# Altium PCB BMS Master brd2.PcbDoc
Units mm, origin at the board's own origin, x right, y up, seen from the top; angles counter-clockwise.
Board outline 152.8 x 102 mm, 2 copper layers (Top Layer, Bottom Layer); 71 components, 56 nets, 298 pads, 43 vias.
Unrouted connection lines stored in the file: 49.
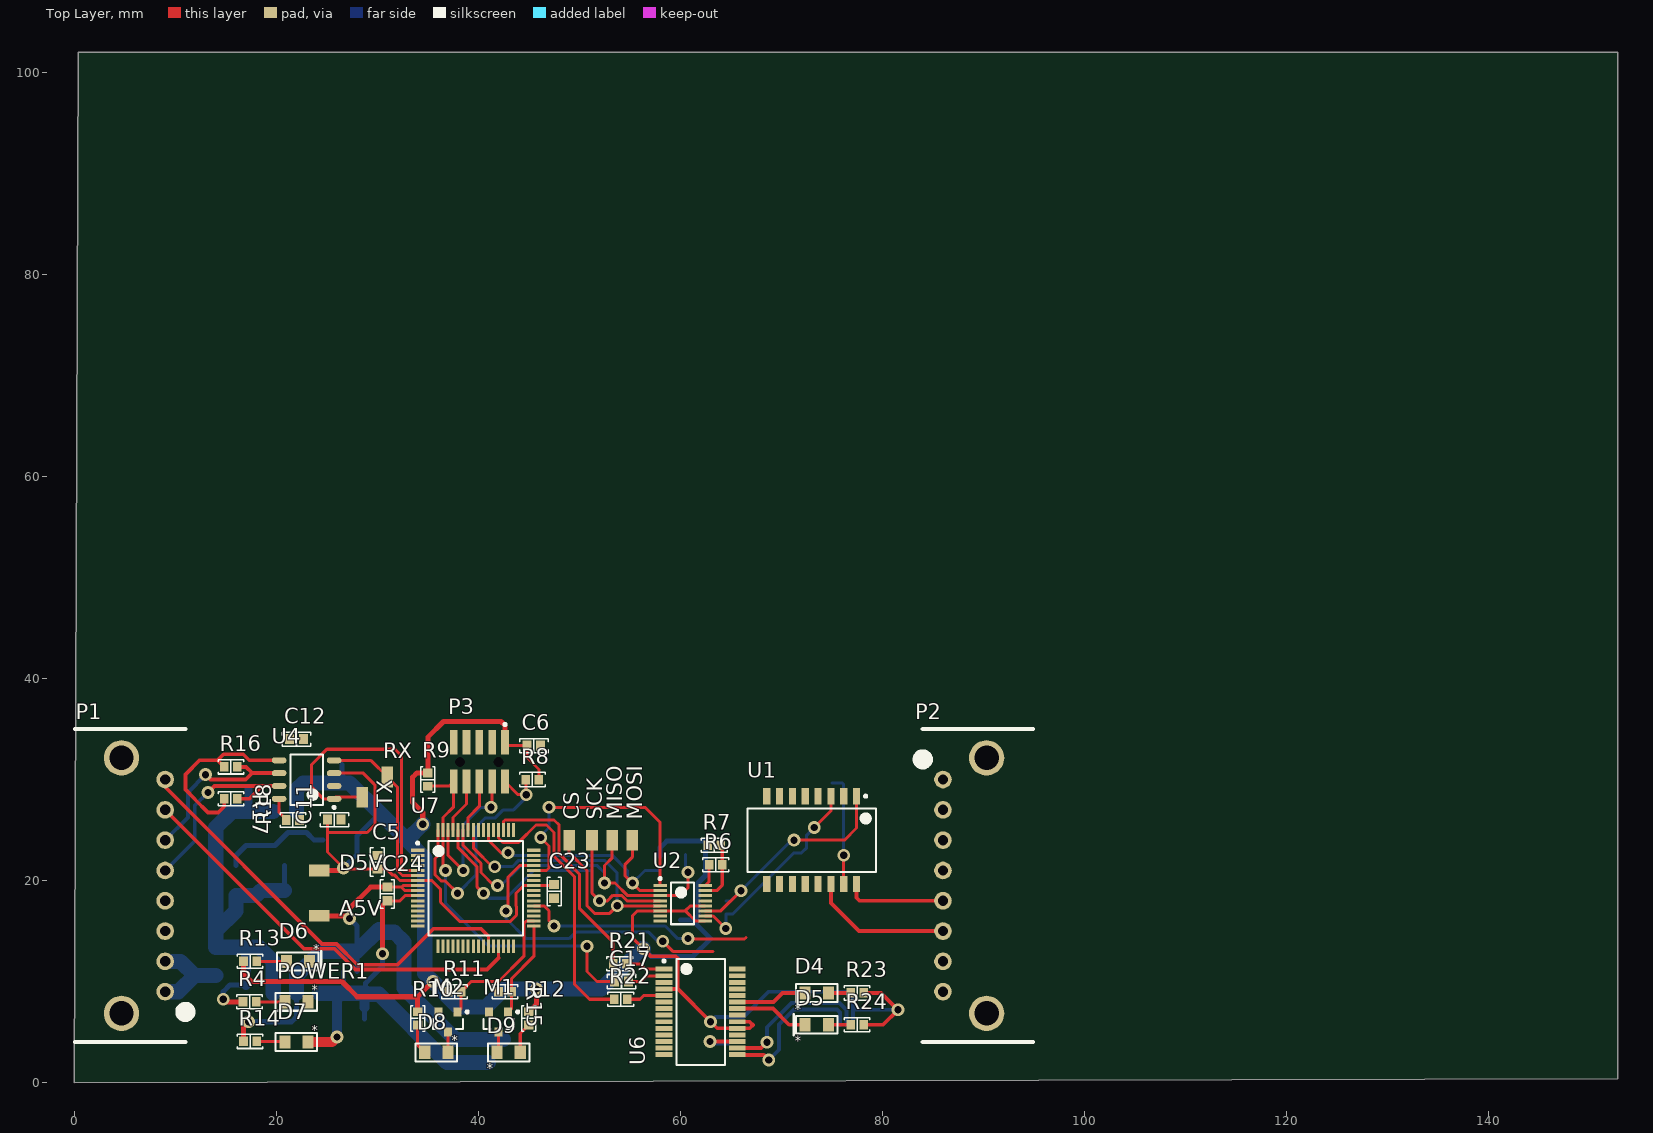
[diagram p0: Top Layer view]
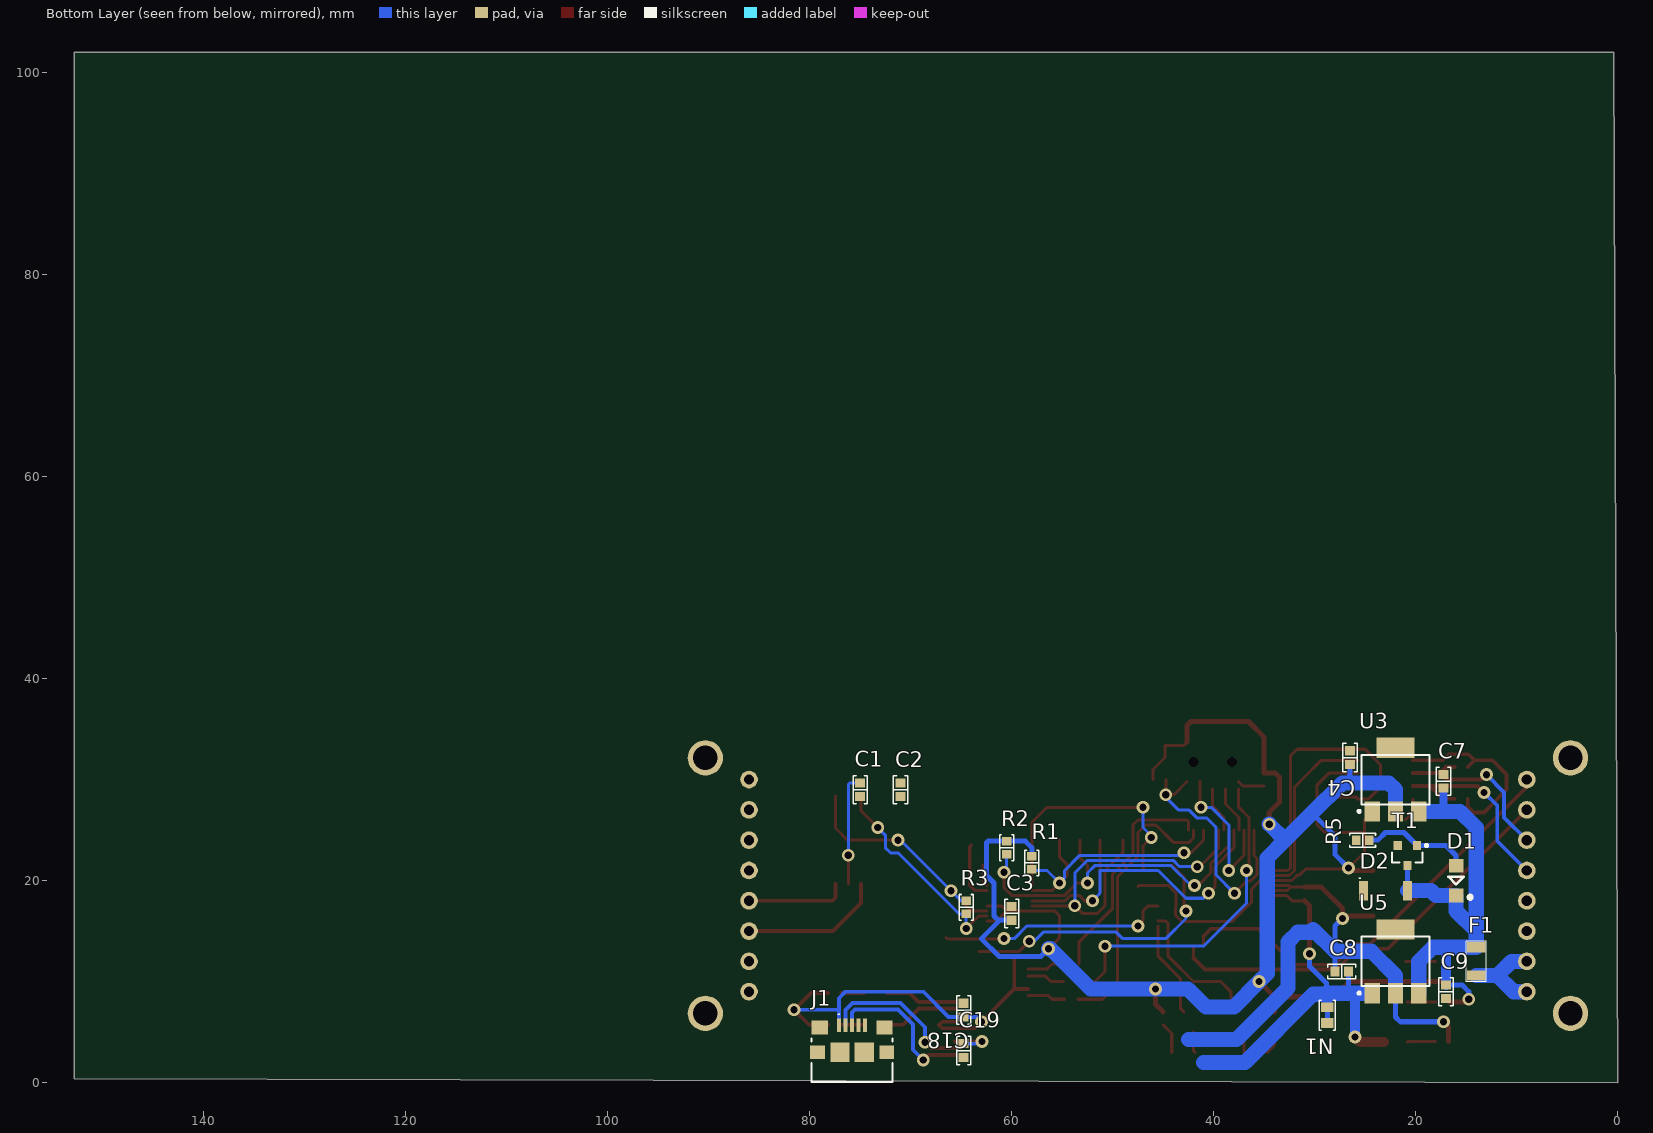
[diagram p1: Bottom Layer view, seen from below]
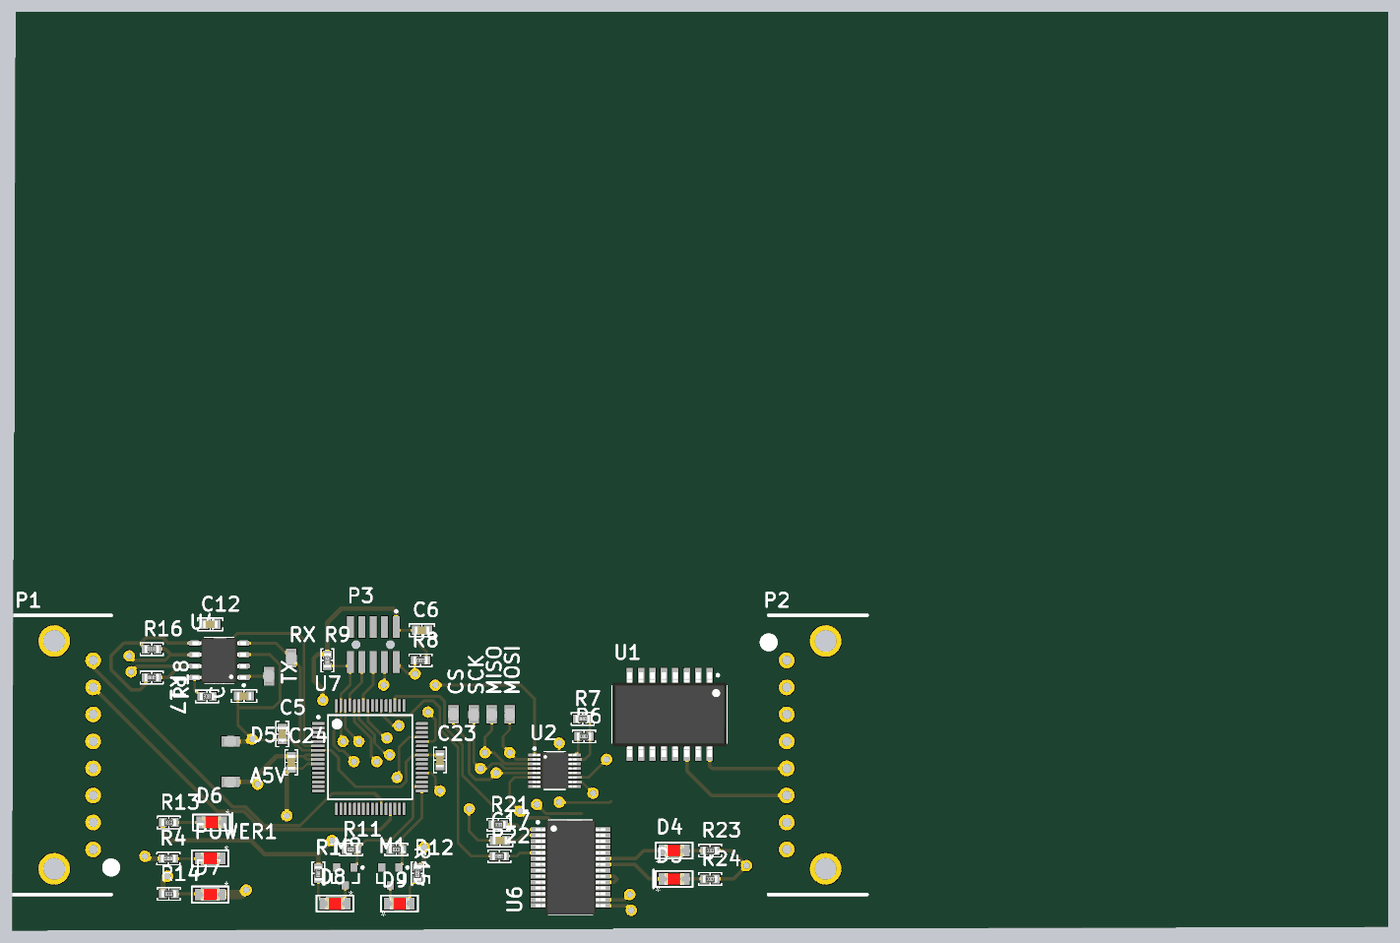
[diagram p2: 3D render of the assembled board from above, using the file's embedded part models]
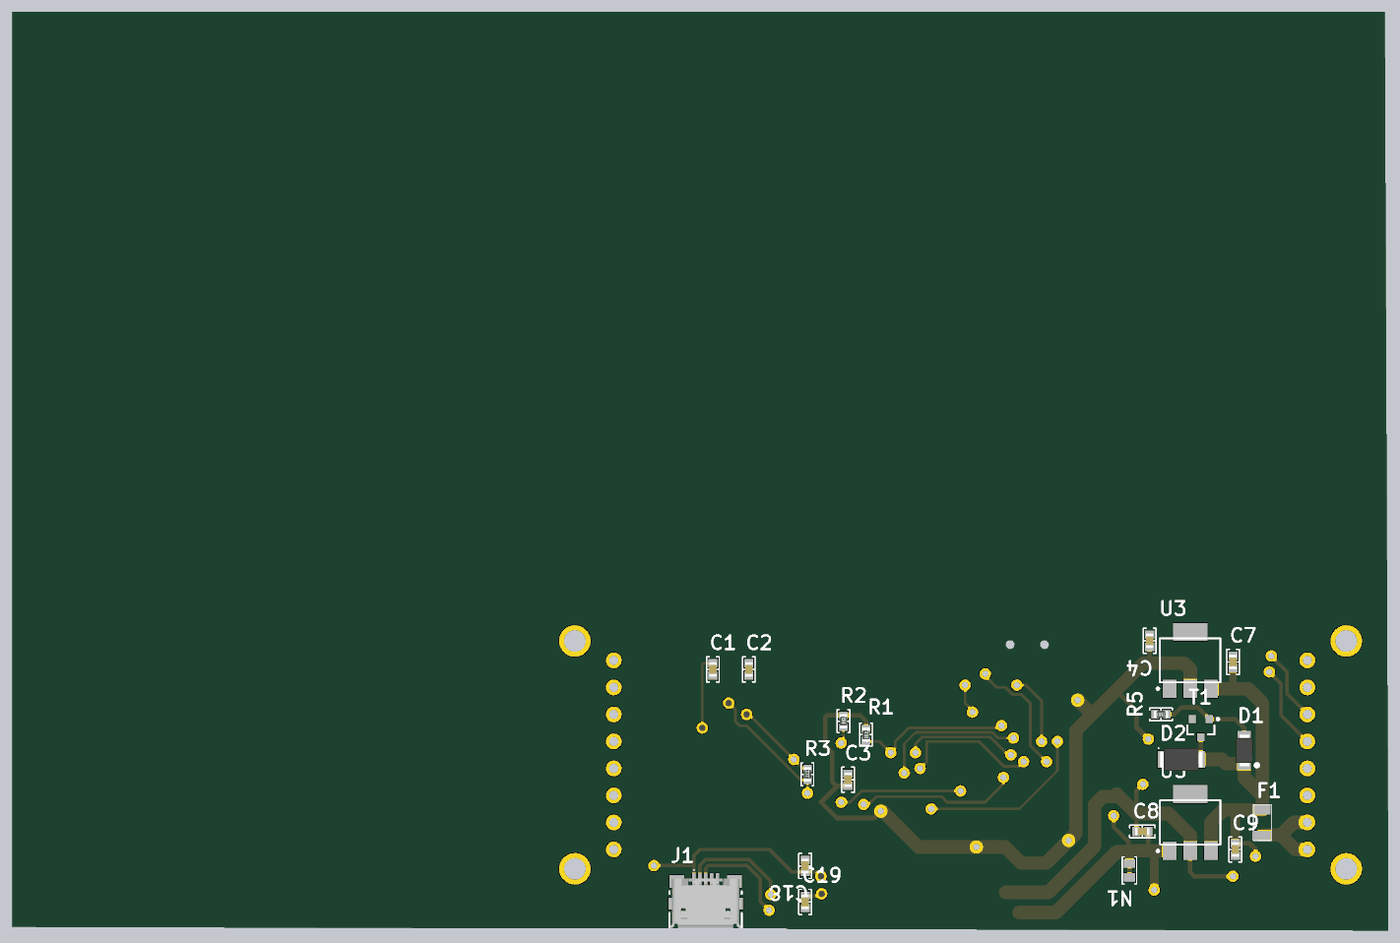
[diagram p3: 3D render of the assembled board from below, using the file's embedded part models]

## Layer stack, top to bottom
Top Solder: solder mask 0.0102, Solder Resist, Dk 3.5
Top Layer: signal copper 0.0356
Dielectric 1: dielectric 0.32, FR-4, Dk 4.8
Bottom Layer: signal copper 0.0356
Bottom Solder: solder mask 0.0102, Solder Resist, Dk 3.5

## Board outline
0,0 152.8,0.4 152.8,102 0.4,102

## Design rules (kind name [scope] priority, off if disabled: settings)
Clearance [All] p1: gap=0.254 ignorepadtopadclearanceinfootprint=FALSE except(0: Arc-Hole Track-Hole SMDPad-SMDPad SMDPad-Hole THPad-Hole Via-Hole Fill-Hole Poly-Hole Region-Hole Text-Hole; 0.1: Arc-Arc Arc-Track Arc-SMDPad Track-Track Track-SMDPad)
DiffPairsRouting [All] p1: maxlimit=0.254 minlimit=0.254 mostfreqgap=0.254 toplayer_minwidth=0.381 toplayer_maxwidth=0.381 toplayer_prefwidth=0.381 bottomlayer_minwidth=0.381 bottomlayer_maxwidth=0.381 bottomlayer_prefwidth=0.381 maxuncoupledlength=12.7
MatchedLengths "Schematic Matched Net Lengths" [InNet('D_N')] p1: tolerance=0.254 checknetsindiffpair=FALSE checkdiffpairvsdiffpair=TRUE checkxsignals=TRUE checkothers=TRUE
PolygonConnect [All] p1: connectstyle=Relief reliefconductorwidth=0.254 reliefentries=4 polygonreliefangle="90 Angle" airgapwidth=0.254
RoutingVias [All] p1: holewidth=0.711 width=1.27 viastyle="Through Hole" minholewidth=0.711 minwidth=1.27 maxholewidth=0.711 maxwidth=1.27
SolderMaskExpansion [All] p1: expansion=0.102
Width [All] p1: maxlimit=10 minlimit=0.254 preferedwidth=0.254 minimp=50.000000 maximp=50.000000 favimp=50.000000
29 further rules are at their usual default settings.

## Classes and differential pairs
component class U_USB: C17 C18 C19 D4 D5 J1 R21 R22 R23 R24 U6
component class U_RVP_OVP_LC: D1 D2 POWER1 R4 R5 T1
component class U_Power: A5V C4 C7 C8 C9 D5V D6 D7 R13 R14 U3 U5
component class U_MCU_MKE185F512VLH16: C5 C6 C23 C24 CS D8 D9 M1 M2 MISO MOSI P3 R8 R9 R10 R11 R12 R15 RX SCK TX U7
component class U_CAN_Tranceiver: C11 C12 R16 R17 R18 U4
component class "BMS Master": C1 C2 C3 F1 N1 P1 P2 R1 R2 R3 R6 R7 U1 U2
differential pair ISO: +ISO_P -ISO_N
differential pair D: +D_P -D_N
differential pair CAN: +CAN_P -CAN_N

## Components (designator, comment, footprint, x,y, rotation, side; value= is the part's Value field where it differs from the comment)
A5V "RCU-0C" RCU-0C 24.25,16.5 r90 top (schematic designator AVCC_5V)
C1 "Capacitor MLCC 27pf 25V CAP 0603/1608" "CAP 0603/1608" 75,29 r90 bottom value=27pf
C2 "Capacitor MLCC 27pf 25V CAP 0603/1608" "CAP 0603/1608" 71,29 r90 bottom value=27pf
C3 "Capacitor MLCC 0.10uf 25V CAP 0603/1608" "CAP 0603/1608" 60,16.75 r90 bottom value=0.10uf
C4 "Capacitor MLCC 10uf 25V CAP 0603/1608" "CAP 0603/1608" 26.5,32.175 r270 bottom value=10uf
C5 "Capacitor MLCC 0.10uf 25V CAP 0603/1608" "CAP 0603/1608" 30,21.825 r270 top value=0.10uf
C6 "Capacitor MLCC 0.10uf 16V CAP 0603/1608" "CAP 0603/1608" 45.5,33.35 r180 top value=0.10uf
C7 "Capacitor MLCC 10uf 25V CAP 0603/1608" "CAP 0603/1608" 17.25,29.825 r270 bottom value=10uf
C8 "Capacitor MLCC 10uf 25V CAP 0603/1608" "CAP 0603/1608" 27.325,11 r0 bottom value=10uf
C9 "Capacitor MLCC 10uf 25V CAP 0603/1608" "CAP 0603/1608" 17,9 r90 bottom value=10uf
C11 "Capacitor MLCC 0.10uf 50V CAP 0603/1608" "CAP 0603/1608" 25.75,26.037 r180 top value=0.10uf
C12 "Capacitor MLCC 4700pf 50V CAP 0603/1608" "CAP 0603/1608" 22,34 r180 top value=4700pf
C17 "Capacitor MLCC 0.10uf 25V CAP 0603/1608" "CAP 0603/1608" 54.175,10 r180 top value=0.10uf
C18 "Capacitor MLCC 0.10uf 25V CAP 0603/1608" "CAP 0603/1608" 64.75,7.175 r270 bottom value=0.10uf
C19 "Capacitor MLCC 0.10uf 25V CAP 0603/1608" "CAP 0603/1608" 64.75,3.175 r90 bottom value=0.10uf
C23 "Capacitor MLCC 100pf 25V CAP 0603/1608" "CAP 0603/1608" 47.5,18.925 r90 top value=100pf
C24 "Capacitor MLCC 0.10uf 25V CAP 0603/1608" "CAP 0603/1608" 31,18.675 r90 top value=0.10uf
CS "RCU-0C" RCU-0C 49,24 r0 top
D1 "DDZ9701-7" SOD123F 16,20 r270 bottom value=14Vz
D2 "DIODE" SOD-128 23,19 r180 bottom value=5A
D4 "" 0805_LED 73.5,8.875 r180 top value=Green
D5 "" 0805_LED 73.5,5.725 r180 top value=Red
D5V "RCU-0C" RCU-0C 24.25,21 r90 top (schematic designator DVCC_5V)
D6 "LED" 0805_LED 22.15,12 r0 top value=Red
D7 "LED" 0805_LED 22,4 r0 top value=Green
D8 "LED" 0805_LED 35.85,3 r0 top value=Green
D9 "LED" 0805_LED 43,3 r180 top value=Green
F1 "2.2A" "PTC Fuse 1206/3216" 14,12 r270 bottom
J1 "1981568-1" TECO-1981568-5_V 75.8,5.675 r180 bottom value=CONN
M1 "DMG2302UK-7" SOT23-3 42,6 r270 top value=N_Channel
M2 "DMG2302UK-7" SOT23-3 37,6 r270 top value=N_Channel
MISO "RCU-0C" RCU-0C 53.25,24 r180 top
MOSI "RCU-0C" RCU-0C 55.25,24 r180 top
N1 "Net_Tie" Net_Tie 28.75,6.675 r270 bottom net-tie
P1 "2-1445054-8" 2-1445054-8 9,9 r270 top
P2 "2-1445054-8" 2-1445054-8 86,30 r90 top
P3 "5103309-1" HDR2X5_SMT 40.095,31.75 r180 top value=CONN
POWER1 "LED" 0805_LED 22,8 r0 top value=Green
R1 "Resistor 10k 0603 1/10W 5%" "RES 0603/1608" 58,21.75 r90 bottom value=10k
R2 "Resistor 10k 0603 1/10W 5%" "RES 0603/1608" 60.5,23.25 r90 bottom value=10k
R3 "Resistor 120 0603 1/10W 5%" "RES 0603/1608" 64.5,17.35 r90 bottom value=120
R4 "Resistor 470 0603 1/10W 5%" "RES 0603/1608" 17.35,8 r180 top value=470
R5 "Resistor 47k 0603 1/10W 5%" "RES 0603/1608" 25.25,24 r180 bottom value=47k
R6 "Resistor 1.5k 0603 1/10W 5%" "RES 0603/1608" 63.5,21.56 r0 top value=1.5k
R7 "Resistor 1.0k 0603 1/10W 5%" "RES 0603/1608" 63.35,23.5 r0 top value=1.0k
R8 "Resistor 10k 0603 1/10W 1%" "RES 0603/1608" 45.35,30 r0 top value=10k
R9 "Resistor 10k 0603 1/10W 5%" "RES 0603/1608" 35,30 r90 top value=10k
R10 "Resistor 470 0603 1/10W 5%" "RES 0603/1608" 34,6.35 r90 top value=470
R11 "Resistor 10k 0603 1/10W 1%" "RES 0603/1608" 37.65,9 r0 top value=10k
R12 "Resistor 470 0603 1/10W 5%" "RES 0603/1608" 45,6.35 r90 top value=470
R13 "Resistor 200 0603 1/10W 5%" "RES 0603/1608" 17.4,12 r0 top value=200
R14 "Resistor 200 0603 1/10W 5%" "RES 0603/1608" 17.4,4.075 r0 top value=200
R15 "Resistor 10k 0603 1/10W 1%" "RES 0603/1608" 42.65,9 r0 top value=10k
R16 "Resistor 62 0603 1/10W 5%" "RES 0603/1608" 15.5,31.25 r180 top value=62
R17 "Resistor 62 0603 1/10W 5%" "RES 0603/1608" 15.5,28.095 r0 top value=62
R18 "Resistor 100 0603 1/10W 10%" "RES 0603/1608" 21.65,26 r180 top value=100
R21 "Resistor 1.0k 0603 1/10W 5%" "RES 0603/1608" 54,11.75 r180 top value=1.0k
R22 "Resistor 1.0k 0603 1/10W 5%" "RES 0603/1608" 54.1,8.25 r180 top value=1.0k
R23 "Resistor 1.0k 0603 1/10W 5%" "RES 0603/1608" 77.5,8.875 r0 top value=1.0k
R24 "Resistor 1.0k 0603 1/10W 5%" "RES 0603/1608" 77.5,5.725 r0 top value=1.0k
RX "RCU-0C" RCU-0C 31,30.25 r180 top (schematic designator TEST_CANRX1)
SCK "RCU-0C" RCU-0C 51.25,24 r180 top
T1 "DMG2302UK-7" SOT23-3 20.825,22.475 r270 bottom value=N_Channel
TX "RCU-0C" RCU-0C 28.5,28.25 r0 top (schematic designator TEST_CANTX1)
U1 "HX1188NLT" HX1188NLT 73,24 r270 top
U2 "LTC6820" MSOP-16 60.225,17.75 r0 top
U3 "NCP1117ST50T3G" SOT-223-3 22,30 r90 bottom value="5V 1.0A"
U4 "MCP2561 CAN Transceiver" SOIC-8 23,30 r180 top value=CAN/UART
U5 "NCP1117ST50T3G" SOT-223-3 22,12 r90 bottom value="5V 1.0A"
U6 "FT232RL" SSOP-28 62,7 r0 top
U7 "" TQFP64 39.75,19.25 r0 top

## Footprints (in the part's own frame and the unit in brackets; to place one, negate y for a bottom-side part, rotate by r counter-clockwise, add the part's x,y. Pads: shape width x height; smd on the part's side, far side on the other; paste and mask are expansions set on the pad)
2-1445054-8 [mm] "8p through hole connector"
  round 1.75 hole 1.02: 1(0,0) 2(-3,0) 3(-6,0) 4(-9,0) 5(-12,0) 6(-15,0) 7(-18,0) 8(-21,0)
  round 3.5 hole 2.41: 9(-23.15,-4.32) 10(2.15,-4.32)
  silkscreen extent -26,-8.92 5,2.5, body extent -26,-8.92 5,0, height 4.37
0805_LED [mm]
  rect 1.1x1.3 smd: 1(-1.15,0) 2(1.15,0)
  silkscreen extent -2.06,-0.89 2.03,0.89, body extent -1.05,-0.67 1.05,0.68, height 0.9
"CAP 0603/1608" [mm] "Chip Capacitor, 2-Leads, Body 1.60x0.80mm, IPC Medium Density"
  rect 0.9x1 smd: 1(-0.675,0) 2(0.675,0)
  silkscreen extent -1.4,-0.7 1.4,0.7, body extent -0.8,-0.41 0.8,0.41, height 0.82
HDR2X5_SMT [mm] "Header, 10-Leads, Body 3.43x6.35mm, Pitch 1.27mm"
  rect 0.76x2.4 smd: 1(-2.54,-1.95) 2(-2.54,1.95) 3(-1.27,-1.95) 4(-1.27,1.95) 5(0,-1.95) 6(0,1.95) 7(1.27,-1.95) 8(1.27,1.95) 9(2.54,-1.95) 10(2.54,1.95)
  round 0 hole 1 unplated: MH1(-1.905,0) MH2(1.905,0)
  silkscreen extent -2.67,-3.82 -2.42,-3.58, body extent -3.18,-1.72 3.18,1.72, height 4.55
HX1188NLT [mm] "XFRMR MAGNETIC 1PORT 1:1 10/100"
  rect 1.6x0.7 smd: 1(-4.35,4.445) 2(-4.35,3.175) 3(-4.35,1.905) 4(-4.35,0.635) 5(-4.35,-0.635) 6(-4.35,-1.905) 7(-4.35,-3.175) 8(-4.35,-4.445) 9(4.35,-4.445) 10(4.35,-3.175) 11(4.35,-1.905) 12(4.35,-0.635) 13(4.35,0.635) 14(4.35,1.905) 15(4.35,3.175) 16(4.35,4.445)
  silkscreen extent -4.47,-6.35 3.15,6.35, body extent -4.7,-6.35 4.7,6.35, height 5.97
MSOP-16 [mm]
  rect 1.35x0.3 smd: 1(-2.225,1.75) 2(-2.225,1.25) 3(-2.225,0.75) 4(-2.225,0.25) 5(-2.225,-0.25) 6(-2.225,-0.75) 7(-2.225,-1.25) 8(-2.225,-1.75) 9(2.225,-1.75) 10(2.225,-1.25) 11(2.225,-0.75) 12(2.225,-0.25) 13(2.225,0.25) 14(2.225,0.75) 15(2.225,1.25) 16(2.225,1.75)
  silkscreen extent -2.35,-2.08 1.15,2.57, body extent -2.45,-2.05 2.45,2.05, height 1.1
Net_Tie [mm] "Chip Resistor, 2-Leads, Body 2.00x1.25mm, IPC High Density"
  rect 0.95x1.25 smd: 1(-0.775,0) 2(0.775,0)
  Top Layer lines w0.5: 0.381,0 -0.381,0
  silkscreen extent -1.5,-0.8 1.5,0.8
"PTC Fuse 1206/3216" [mm]
  rect 1x1.8 smd: 1(-1.4,0) 2(1.4,0)
  silkscreen extent -2,-1 2,1, body extent -1.75,-1 1.75,1, height 1
RCU-0C [mm]
  rect 1.15x2.05 smd: 1(0,0)
  body extent -0.6,-0.77 0.6,0.82, height 1.16
"RES 0603/1608" [mm] "Chip Resistor, 2-Leads, Body 1.60x0.80mm, IPC Medium Density"
  rect 0.85x0.95 smd: 1(-0.65,0) 2(0.65,0)
  silkscreen extent -1.27,-0.7 1.27,0.7, body extent -0.8,-0.4 0.8,0.4, height 0.45
SOD123F [mm] "SODFL, 2-Leads, Body 1.80x3.50mm, IPC Low Density"
  rect 1.35x1.45 smd: 1(-1.475,0) 2(1.475,0)
  silkscreen extent -0.38,-0.76 1.75,1.5, body extent -1.75,-0.95 1.75,0.95, height 1.15
SOD-128 [mm] "SOD-128, 2-Leads, Body 2.40x4.70mm, IPC Medium Density"
  rect 0.9x1.9 smd: 1(-2.175,0) 2(2.175,0)
  silkscreen extent -2.57,1.2 -2.48,1.3, body extent -2.35,-1.25 2.35,1.25, height 0.85
SOIC-8 [mm] "SOIC, 8-Leads, Body 4.90x3.90mm, Pitch 1.27mm, IPC Medium Density"
  oval 1.45x0.6 smd: 1(-2.725,1.905) 2(-2.725,0.635) 3(-2.725,-0.635) 4(-2.725,-1.905) 5(2.725,-1.905) 6(2.725,-0.635) 7(2.725,0.635) 8(2.725,1.905)
  silkscreen extent -2.85,-2.5 1.6,2.88, body extent -3,-2.5 3,2.5, height 1.75
SOT23-3 [mm] "SOT23, 3-Leads, Body 2.92x2.37mm, Pitch 0.95mm, IPC Medium Density, NUP2105L"
  rect 0.9x0.8 smd: 1(-1,0.95) 2(-1,-0.95) 3(1,0)
  silkscreen extent -1.12,-1.5 0.7,2.03, body extent -0.7,-1.52 0.7,1.52, height 1.11
SOT-223-3 [mm] "SOT223127P600-8N, NCP1117STAT3G, MMBT4403-7-F"
  rect 2x1.5 smd: 1(-3.15,2.3) 2(-3.15,0) 3(-3.15,-2.3)
  rect 2x3.8 smd: THM(3.15,0)
  silkscreen extent -3.27,-3.35 2.45,3.73, body extent -1.85,-3.35 1.85,3.35, height 1.8
SSOP-28 [mm] "hi"
  rect 1.65x0.49 smd: 1(-3.625,4.225) 2(-3.625,3.575) 3(-3.625,2.925) 4(-3.625,2.275) 5(-3.625,1.625) 6(-3.625,0.975) 7(-3.625,0.325) 8(-3.625,-0.325) 9(-3.625,-0.975) 10(-3.625,-1.625) 11(-3.625,-2.275) 12(-3.625,-2.925) 13(-3.625,-3.575) 14(-3.625,-4.225) 15(3.625,-4.225) 16(3.625,-3.575) 17(3.625,-2.925) 18(3.625,-2.275) 19(3.625,-1.625) 20(3.625,-0.975) 21(3.625,-0.325) 22(3.625,0.325) 23(3.625,0.975) 24(3.625,1.625) 25(3.625,2.275) 26(3.625,2.925) 27(3.625,3.575) 28(3.625,4.225)
  silkscreen extent -3.75,-5.25 2.4,5.25, body extent -3.9,-5.25 3.9,5.25, height 2
TECO-1981568-5_V [mm] "SMD, 5-Leads, Body 8x5.9mm, Pitch 0.65mm"
  rect 0.4x1.35 smd: 1(-1.3,0) 2(-0.65,0) 3(0,0) 4(0.65,0) 5(1.3,0)
  rect 1.6x1.4 smd: 6(-3.2,-0.225) 7(3.2,-0.225)
  rect 1.45x1.3 smd: 8(-3.425,-2.675) 9(3.425,-2.675)
  rect 1.9x1.9 smd: 10(-1.2,-2.675) 11(1.2,-2.675)
  silkscreen extent -4,-5.63 4,1.12, body extent -4,-5.5 4,0.1, height 2.79
TQFP64 [mm] "TSQFP, 64-Leads, Body 10.00x10.00mm, Pitch 0.50mm, IPC Medium Density, MKE18F512VLH16"
  rect 1.35x0.3 smd: 1(-5.75,3.75) 2(-5.75,3.25) 3(-5.75,2.75) 4(-5.75,2.25) 5(-5.75,1.75) 6(-5.75,1.25) 7(-5.75,0.75) 8(-5.75,0.25) 9(-5.75,-0.25) 10(-5.75,-0.75) 11(-5.75,-1.25) 12(-5.75,-1.75) 13(-5.75,-2.25) 14(-5.75,-2.75) 15(-5.75,-3.25) 16(-5.75,-3.75) 33(5.75,-3.75) 34(5.75,-3.25) 35(5.75,-2.75) 36(5.75,-2.25) 37(5.75,-1.75) 38(5.75,-1.25) 39(5.75,-0.75) 40(5.75,-0.25) 41(5.75,0.25) 42(5.75,0.75) 43(5.75,1.25) 44(5.75,1.75) 45(5.75,2.25) 46(5.75,2.75) 47(5.75,3.25) 48(5.75,3.75)
  rect 0.3x1.35 smd: 17(-3.75,-5.75) 18(-3.25,-5.75) 19(-2.75,-5.75) 20(-2.25,-5.75) 21(-1.75,-5.75) 22(-1.25,-5.75) 23(-0.75,-5.75) 24(-0.25,-5.75) 25(0.25,-5.75) 26(0.75,-5.75) 27(1.25,-5.75) 28(1.75,-5.75) 29(2.25,-5.75) 30(2.75,-5.75) 31(3.25,-5.75) 32(3.75,-5.75) 49(3.75,5.75) 50(3.25,5.75) 51(2.75,5.75) 52(2.25,5.75) 53(1.75,5.75) 54(1.25,5.75) 55(0.75,5.75) 56(0.25,5.75) 57(-0.25,5.75) 58(-0.75,5.75) 59(-1.25,5.75) 60(-1.75,5.75) 61(-2.25,5.75) 62(-2.75,5.75) 63(-3.25,5.75) 64(-3.75,5.75)
  silkscreen extent -5.87,-4.67 4.67,4.68, body extent -5,-5 5,5, height 1.6

## Part data
A5V CS D5V MISO MOSI RX SCK TX: library part 5, Manufacturer_id=1, Package=0603, ComponentLink1Description=Datasheet, ComponentLink1URL=https://www.te.com/commerce/DocumentDelivery/DDEController?Action=srchrtrv&DocNm=1773266&DocType=DS&DocLang=English, Drawer_id=1, idTable=5, Link=https://www.digikey.com/product-detail/en/te-connectivity-amp-connectors/RCU-0C/A106145CT-ND/3477802, MfrPartNo=RCU-0C, Name=RCU-0C_Test_Point
C1 C2: library part 515, Dielectric=Ceramic, Manufacturer_id=1, Package="CAP 0603/1608", Voltage_Rating=25V, Created_By="Nick Mah", Created_Date=10/20/2018, Drawer_id=1, idCapacitor=515, Name="Cap_27pf_25V_CAP 0603/1608"
C3 C5 C17 C18 C19 C24: library part 583, Dielectric=Ceramic, Manufacturer_id=1, Package="CAP 0603/1608", Voltage_Rating=25V, Created_By="Nick Mah", Created_Date=10/20/2018, Drawer_id=1, idCapacitor=583, Name="Cap_0.10uf_25V_CAP 0603/1608"
C4 C7 C8 C9: library part 595, Dielectric=Ceramic, Manufacturer_id=1, Package="CAP 0603/1608", Voltage_Rating=25V, Created_By="Nick Mah", Created_Date=10/20/2018, Drawer_id=1, idCapacitor=595, Name="Cap_10uf_25V_CAP 0603/1608"
C6: library part 223, Dielectric=Ceramic, Manufacturer_id=1, Package="CAP 0603/1608", Voltage_Rating=16V, Created_By="Nick Mah", Created_Date=10/20/2018, Drawer_id=1, idCapacitor=223, Name="Cap_0.10uf_16V_CAP 0603/1608"
C11: library part 943, Dielectric=Ceramic, Manufacturer_id=1, Package="CAP 0603/1608", Voltage_Rating=50V, Created_By="Nick Mah", Created_Date=10/20/2018, Drawer_id=1, idCapacitor=943, Name="Cap_0.10uf_50V_CAP 0603/1608"
C12: library part 929, Dielectric=Ceramic, Manufacturer_id=1, Package="CAP 0603/1608", Voltage_Rating=50V, Created_By="Nick Mah", Created_Date=10/20/2018, Drawer_id=1, idCapacitor=929, Name="Cap_4700pf_50V_CAP 0603/1608"
C23: library part 529, Dielectric=Ceramic, Manufacturer_id=1, Package="CAP 0603/1608", Voltage_Rating=25V, Created_By="Nick Mah", Created_Date=10/20/2018, Drawer_id=1, idCapacitor=529, Name="Cap_100pf_25V_CAP 0603/1608"
D1: library part 10, "Zener Diode 14V 500mW ±5% Surface Mount SOD-123", Manufacturer_id=8, Package=SOD-123, Power=500mW, Supplier1PartNo=DDZ9701-7DICT-ND, ComponentLink1Description=Datasheet, ComponentLink1URL=https://www.diodes.com/assets/Datasheets/ds30410.pdf, Drawer_id=1, idDiode=10, Link=https://www.digikey.com/product-detail/en/diodes-incorporated/DDZ9701-7/DDZ9701-7DICT-ND/3877402, MfrPartNo=DDZ9701-7, Name=DDZ9701, Num_Circuits=1, Supplier1=Digi-Key, Type=Zener
D2: library part 12, "DIODE SCHOTTKY 30V 5A TMINIP2", Manufacturer_id=1, MfrPartNo=DB2431200L, Package=SOD-128, Power=30V, Supplier1PartNo=DB2431200LCT-ND, ComponentLink1Description=Datasheet, ComponentLink1URL=https://industrial.panasonic.com/content/data/SC/ds/ds4/DB2431200L_E.pdf, Drawer_id=1, Ic=5A, idDiode=12, Link=https://www.digikey.com/product-detail/en/panasonic-electronic-components/DB2431200L/DB2431200LCT-ND/3884430, Name=DB2431200L, Num_Circuits=1, Supplier1=Digi-Key, Type=Schottky
D4 D7 D8 D9 POWER1: library part 2, Manufacturer_id=1, Package=0805, Brightness=7mcd, Drawer_id=1, Id=20mA, idLED=2, Link=https://www.digikey.com/product-detail/en/visual-communications-company-vcc/CMD17-21VGD-TR8/L62505CT-ND/254936, Name=CMD17_0805_GREEN, Vf=2.1V
D5 D6: library part 1, Package=0805, Drawer_id=1, idLED=1, Manufacturer_id=1, Name=LED_0805_RED, Vf=0.7V
F1: library part 8, "Fuse", Manufacturer_id=1, MfrPartNo=1206L110/12SLYR, Drawer_id=1, I_hold=1.1A, I_max=50A, I_trip=2.2A, idFuse=8, LatestRevisionDate=17-Jul-2002, LatestRevisionNote="Re-released for DXP Platform.", Link=https://www.digikey.com/product-detail/en/littelfuse-inc/1206L110-12SLYR/F5764CT-ND/3593809, Name=Resettable, PackageDescription="Thru-Hole; 2 Leads", PackageReference=PIN-W2/E2.8, Pd_Typ=.8W, Published=8-Jun-2000, Publisher="Altium Limited", V_max=12V
J1: library part 5, "USB Micro Type B", Manufacturer_id=1, ComponentLink1Description=Datasheet, Created_By=Aiku, Created_Date=10/20/2018, Drawer_id=1, idConn=5, Link=https://www.mouser.com/ProductDetail/TE-Connectivity-AMP/1981568-1?qs=sGAEpiMZZMulM8LPOQ%252bykzEIUPbUCiSfqsfxH3Oq%252bYo%3d, MfrPartNo=1981568-1, Name="TE USB Micro", Num_Contacts=5, Supplier1=TE
M1 M2 T1: library part 6, "MOSFET N-CHANNEL 30V 5A SOT23", Manufacturer_id=1, Package=SOT-23, Created_By=Angel, Drawer_id=1, Id=2.8A, idFETs=6, Link=https://www.digikey.com/product-detail/en/diodes-incorporated/DMG2302UK-7/DMG2302UK-7DICT-ND/6010163, MfrPartNo=DMG2302UK-7, Name=DMG2302UK-7, Num_Circuits=1, Rds_On=90mOhm, Supplier1=Digi-Key, Vdss=20V, Vgs(Max)=1V, Vgs(typ)=800mV
N1 U7: library part 1, Drawer_id=1, Manufacturer_id=1
  N1: idFuse=3, idShunt=1, Name="Net Tie"
  U7: idMCU=1, Name="MKE18F512VLH16 MCU"
P1 P2: library part 12, "1x8 connector", Manufacturer_id=5, Supplier1PartNo=2-1445054-8-ND, ComponentLink1Description=Datasheet, Created_By=Graydon, Created_Date=11/10/2018, Drawer_id=1, idConn=12, Link=https://www.digikey.com/product-detail/en/te-connectivity-amp-connectors/2-1445054-8/2-1445054-8-ND/1890093, MfrPartNo=2-1445054-8, Name="Micro MATE-N-LOK 1x8", Num_Contacts=8, Num_Rows=1, Supplier1=Digi-Key
P3: library part 4, "2 row connector", Manufacturer_id=1, Voltage_Rating=None, ComponentLink1Description=Datasheet, Created_By=Aiku, Drawer_id=1, idConn=4, Link=https://www.digikey.com/product-detail/en/5103309-1/A33160-ND/1114898?utm_campaign=buynow&WT.z_cid=ref_octopart_dkc_buynow&utm_medium=aggregator&curr=usd&site=us&utm_source=octopart, MfrPartNo=5103309-1, Name=CONN_TE_2X5POS, Num_Contacts=10, Num_Rows=2, Pitch=2.54mm
R1 R2 R9: library part 1393, Manufacturer_id=1, Package=0603, Power=1/10W, Tolerance=5%, ComponentLink1Description=Datasheet, Created_By="Nick Mah", Created_Date=2018-10-20, Drawer_id=1, idResistor=1393, Name=Res_10k_0603_1/10W_5%, Supplier 1=Digi-Key
R3: library part 1347, Manufacturer_id=1, Package=0603, Power=1/10W, Tolerance=5%, ComponentLink1Description=Datasheet, Created_By="Nick Mah", Created_Date=2018-10-20, Drawer_id=1, idResistor=1347, Name=Res_120_0603_1/10W_5%, Supplier 1=Digi-Key
R4 R10 R12: library part 1361, Manufacturer_id=1, Package=0603, Power=1/10W, Tolerance=5%, ComponentLink1Description=Datasheet, Created_By="Nick Mah", Created_Date=2018-10-20, Drawer_id=1, idResistor=1361, Name=Res_470_0603_1/10W_5%, Supplier 1=Digi-Key
R5: library part 1409, Manufacturer_id=1, Package=0603, Power=1/10W, Tolerance=5%, ComponentLink1Description=Datasheet, Created_By="Nick Mah", Created_Date=2018-10-20, Drawer_id=1, idResistor=1409, Name=Res_47k_0603_1/10W_5%, Supplier 1=Digi-Key
R6: library part 1373, Manufacturer_id=1, Package=0603, Power=1/10W, Tolerance=5%, ComponentLink1Description=Datasheet, Created_By="Nick Mah", Created_Date=2018-10-20, Drawer_id=1, idResistor=1373, Name=Res_1.5k_0603_1/10W_5%, Supplier 1=Digi-Key
R7 R21 R22 R23 R24: library part 1369, Manufacturer_id=1, Package=0603, Power=1/10W, Tolerance=5%, ComponentLink1Description=Datasheet, Created_By="Nick Mah", Created_Date=2018-10-20, Drawer_id=1, idResistor=1369, Name=Res_1.0k_0603_1/10W_5%, Supplier 1=Digi-Key
R8 R11 R15: library part 313, Manufacturer_id=1, Package=0603, Power=1/10W, Tolerance=1%, ComponentLink1Description=Datasheet, Created_By="Nick Mah", Created_Date=2018-10-20, Drawer_id=1, idResistor=313, Name=Res_10k_0603_1/10W_1%, Supplier 1=Digi-Key
R13 R14: library part 1352, Manufacturer_id=1, Package=0603, Power=1/10W, Tolerance=5%, ComponentLink1Description=Datasheet, Created_By="Nick Mah", Created_Date=2018-10-20, Drawer_id=1, idResistor=1352, Name=Res_200_0603_1/10W_5%, Supplier 1=Digi-Key
R16 R17: library part 1340, Manufacturer_id=1, Package=0603, Power=1/10W, Tolerance=5%, ComponentLink1Description=Datasheet, Created_By="Nick Mah", Created_Date=2018-10-20, Drawer_id=1, idResistor=1340, Name=Res_62_0603_1/10W_5%, Supplier 1=Digi-Key
R18: library part 2293, Manufacturer_id=1, Package=0603, Power=1/10W, Tolerance=10%, ComponentLink1Description=Datasheet, Created_By="Nick Mah", Created_Date=2018-10-20, Drawer_id=1, idResistor=2293, Name=Res_100_0603_1/10W_10%, Supplier 1=Digi-Key
U1: library part 8, Manufacturer_id=1, Created_By=Angel, Drawer_id=1, idFuse=3, idIC_Interface=8, Link=https://www.digikey.com/product-detail/en/pulse-electronics-network/HX1188NLT/553-1536-1-ND/3151809?utm_adgroup=Transformers&slid=&gclid=CjwKCAiAhp_jBRAxEiwAXbniXRrdDycXKcdMEppGgTacWMJf80VG2GQDdYxlb9yRzxEZsto0mBbjlhoCtm4QAvD_BwE, MfrPartNo=HX1188NLT, Name=HX1188NLT, Num_Circuits=2, Package=HX1188NLT, Type="Magnetic Isolation"
U2: library part 7, "soSPI Isolated / Communications Interface", Manufacturer_id=1, Package=MSOP-16, Created_By=Angel, Drawer_id=1, idFuse=3, idIC_Interface=7, Link=https://www.mouser.com/ProductDetail/Analog-Devices/LTC6820IMSPBF?qs=sGAEpiMZZMvi6wO7nhr1LyTLeBC7dAWQpR44bZH0zYY%3d, MfrPartNo=LTC6820, Name=LTC6820, Num_Circuits=1, Protocol=isoSPI, Type=bidirectional, Vin(Max)=5.5V, Vin(Min)=2.7V
U3 U5: library part 16, "Linear Voltage Regulator IC Positive Fixed 1 Output 5V 1A SOT-223", Current_Rating=1A, Dropout_Voltage="1.2V @ 800mA", Manufacturer_id=1, Package=SOT-223-3, ComponentLink1Description=Datasheet, ComponentLink1URL=https://www.onsemi.com/pub/Collateral/NCP1117-D.PDF, Created_By="Angel Delgado", Drawer_id=1, idPMIC_Lin=16, Link=https://www.digikey.com/product-detail/en/on-semiconductor/NCP1117ST50T3G/NCP1117ST50T3GOSCT-ND/1967217, MfrPartNo=NCP1117ST50T3G, Name="5V 1A LDO", Num_Outputs=1, Output_Config="5V Fixed", Vin(Max)=20V, Vout(Max)=5.05, Vout(Min)=4.95, Vout_Type=Fixed
U4: library part 5, Manufacturer_id=1, MfrPartNo=MCP2561, Package=SOIC-8, Created_By="Angel Delgado", Data_Rate=1Mbps, Drawer_id=1, idIC_Interface=5, Link=https://www.digikey.com/product-detail/en/microchip-technology/MCP2561T-E-SN/MCP2561T-E-SNCT-ND/5148846, Name="CAN Transceiver", Num_Circuits=1, Protocol=CAN, Type=Transceiver, Vin(Max)=5.5V, Vin(Min)=4.5V
U6: library part 3, Manufacturer_id=1, Created_By=Kyle, Drawer_id=1, idIC_Interface=3, Link=https://www.digikey.com/product-detail/en/ftdi-future-technology-devices-international-ltd/FT232RL-REEL/768-1007-1-ND/1836402, MfrPartNo=FT232RL, Name="USB FTDI", Protocol=UART, Vin(Max)=5.25, Vin(Min)=3.3

## Via types
v1: diameter 1.27, hole 0.711, Top Layer to Bottom Layer, 43 vias

## Nets (pads, with @x,y where several pads share a name; then routed paths per layer and width w, separated by ;. In a path a pad name is that pad's centre, name@x,y a point inside that pad or via, vN(x,y) a via of type N, cw(c..) or ccw(c..) an arc to the next point about the centre after c; other vN are vias at no path point)
+12V: C7.2 C9.2 D1.2 D2.2 F1.1 R4.2 T1.3 U3.3 U5.3 | length 50.9
  Top Layer w0.5: v1(14.75,8.25) 15,8 R4.2
  Bottom Layer w0.5: v1(14.75,8.25) 14.75,9 15.425,9.675 C9.2 ; D2.2 T1.3
  Bottom Layer w0.8: 17.25,26.85 C7.2
  Bottom Layer w1: C9.2 17,13.4
  Bottom Layer w1.5: U5.3 19.7,12 18.3,13.4 17,13.4 F1.1 14,15 ; U3.3 17.25,26.85 15.6,26.85 14,25.25 14,15 ; D2.2 18.475,19 18,18.525 D1.2 16,17 14,15
+12V_prefsd: F1.2 P1.1 P1.2 | length 9.2
  Bottom Layer w1.5: P1.1 10.325,9 11.925,10.6 ; P1.2 10.525,12 11.925,10.6 ; F1.2 11.925,10.6
ADC0_SE3: P2.8 U7.37 | length 23
  Top Layer w0.3: U7.37 46.5,17.5 47,17 47,16 v1(47.5,15.5) ; v1(60.75,14.25) 60.789,14.211 66.361,14.211 66.5,14.35
  Bottom Layer w0.3: v1(47.5,15.5) 58.5,15.5 59.75,14.25 v1(60.75,14.25)
ADC0_SE13: P1.7 U7.29 | length 41.2
  Top Layer w0.3: 42,12.347 U7.29
  Top Layer w0.381: P1.7 22.75,13.25 25.75,13.25 27.81,11.19 40.842,11.19 42,12.347
ADC0_SE15: P1.8 U7.27 | length 42.8
  Top Layer w0.3: U7.27 41,14.481
  Top Layer w0.381: P1.8 9,29.25 24.519,13.731 25.949,13.731 28.01,11.67 31.99,11.67 35.551,15.231 40.25,15.231 41,14.481
ADC1_SE3: P2.7 U7.45 | length 30.3
  Top Layer w0.3: v1(42.747,17) 42.95,17.203 42.95,20.35 44.1,21.5 U7.45 ; v1(58.25,14) 59.25,13 63.25,13
  Bottom Layer w0.3: v1(42.747,17) 42.747,16.253 44.75,14.25 49,14.25 49.639,14.889 56.861,14.889 58.25,13.5 v1(58.25,14)
AGND: C8.1 C9.1 C24.1 D7.2 N1.1 P2.3 P2.4 U5.1 U7.10 | length 44.1
  Top Layer w0.3: C24.1 32.25,18 32.75,18.5 U7.10
  Top Layer w0.5: v1(30.5,12.75) 30.5,17.5 C24.1
  Top Layer w1: D7.2 25.5,4 v1(26,4.5)
  Bottom Layer w0.5: 26.65,8.85 C8.1 ; 28.75,8.25 28.75,8.75 28.85,8.85 28.85,9.85 30.5,11.5 v1(30.5,12.75)
  Bottom Layer w1: v1(26,4.5) 26,8.2 26.65,8.85 ; N1.1 28.75,8.25
  Bottom Layer w1.5: U5.1 26.65,8.85 28.85,8.85 ; 28.75,8.75 30.15,8.75 36.9,2 41,2
AVCC_5V: A5V.1 C8.2 C24.2 P2.1 P2.2 R14.1 U5.2 U7.8 U7.9 | length 59.9
  Top Layer w0.3: C24.2 32.4,19.35 ; U7.9 32.75,19 32.4,19.35 ; U7.8 32.55,19.5 32.4,19.35
  Top Layer w0.5: R14.1 16.75,5.525 v1(17.25,6.025) ; A5V.1 27,16.5 v1(27.25,16.25) 27.25,17.25 29.35,19.35 C24.2
  Bottom Layer w0.5: v1(17.25,6.025) 21.525,6.025 22,6.5 U5.2 ; v1(27.25,16.25) 28,15.5 28,13 C8.2
  Bottom Layer w1.5: U5.2 22,10.6 24.4,13 28,13 30.15,15.15 30.411,14.889 31.679,14.889 32.639,13.929 32.639,9.361 37.75,4.25 42.5,4.25
CAN_N: P1.6 R16.1 U4.6 | length 17.6
  Top Layer w0.381: v1(13,30.485) 13.484,30 16.98,30 17.615,30.635 ; R16.1 17,31.25 17.615,30.635 ; U4.6 17.615,30.635
  Bottom Layer w0.381: P1.6 11.25,26.25 11.25,28.735 v1(13,30.485)
CAN_P: P1.5 R17.2 U4.7 | length 19.8
  Top Layer w0.381: v1(13.223,28.723) 13.865,29.365 18.615,29.365 ; R17.2 17.345,28.095 18.615,29.365 ; U4.7 18.615,29.365
  Bottom Layer w0.381: P1.5 11.92,23.92 11.92,27.42 v1(13.223,28.723)
CAN_RX: RX.1 U4.4 U7.6 | length 17.8
  Top Layer w0.3: U4.4 29.345,31.905 RX.1 32,29.25 32,21 32.5,20.5 U7.6
CAN_TX: TX.1 U4.1 U7.5 | length 30.4
  Top Layer w0.3: TX.1 25.88,28.25 U4.1 24.655,28.095 23.5,29.25 23.5,31.5 25,33 31.75,33 32.4,32.35 32.4,21.25 32.65,21 U7.5
D_N: J1.2 U6.16 | length 15.3
  Top Layer w0.381: U6.16 68,3.425 v1(68.575,4)
  Bottom Layer w0.381: v1(68.575,4) 68.575,5.473 70.987,7.885 75.763,7.885 76.444,7.204 76.444,5.675 J1.2
D_P: J1.3 U6.15 | length 15.3
  Top Layer w0.381: U6.15@65.625,2.736 68.265,2.736 v1(68.75,2.25)
  Bottom Layer w0.381: v1(68.75,2.25) 69.75,3.25 69.75,5.75 71.25,7.25 75.5,7.25 75.8,6.95 J1.3
DGND: C1.1 C2.1 C3.2 C4.1 C5.1 C6.1 C7.1 C11.1 C12.1 C18.1 C19.1 C23.1 D2.1 D6.2 J1.5 M1.2 M2.2 N1.2 P1.3 P1.4 P3.3 P3.5 POWER1.2 R5.1 R7.1 R11.1 R15.1 R18.1 T1.2 U2.7 U2.8 U2.13 U2.14 U3.1 U4.2 U6.7 U6.18 U6.21 U6.25 U6.26 U7.40
DVCC_5V: C3.1 C4.2 C5.2 C6.2 C11.2 C18.2 C23.2 D5V.1 J1.1 P3.1 R1.2 R2.2 R8.2 R9.2 R10.2 R12.2 R13.1 R23.2 R24.2 U2.6 U2.9 U2.12 U3.2 U4.3 U6.4 U6.19 U6.20 U7.7 U7.41 | length 255.6
  Top Layer w0.3: C11.2 25.075,24.75 ; U4.3 28.615,30.635 29.75,29.5 29.75,25.5 29,24.75 25.075,24.75 ; P3.1 42.985,33.35 C6.2 44.825,32.175 46,31 R8.2 ; C23.2@47.5,19.425 47.425,19.5 U7.41 44.475,19.5 43.75,18.775 43.75,17.467 43.786,17.43 43.786,16.57 43.178,15.961 38.144,15.961 36.25,17.855 36.25,19.142 35.392,20 U7.7 32.25,20 31.68,20.57 31.472,20.57 30.892,21.15 C5.2 26.75,21.15 v1(26.65,21.25) 25.075,22.825 25.075,24.75 ; v1(56.35,13.25) 55.25,14.35 55.25,16.5 55.75,17 U2.6 60.5,17 ; U2.9 61.5,16 60.5,17 ; U2.12 61,17.5 60.5,17
  Top Layer w0.381: v1(56.35,13.25) 57.1,12.5 59.539,12.5 59.75,12.289 59.75,9.275 ; U6.4 59.75,9.275 ; U6.20 66.85,6.025 67.188,5.688 66.875,5.375 U6.19 63.65,5.375 v1(63,6.025) 59.75,9.275 ; R24.2 80.068,5.725 v1(81.546,7.204) 79.875,8.875 R23.2
  Top Layer w0.5: R13.1 16.75,10.75 17.5,10 26.5,10 28,8.5 34,8.5 ; D5V.1 26.4,21 v1(26.65,21.25) ; R10.2 34,8.5 ; v1(34.5,25.575) 34.5,26.75 33.5,27.75 33.5,30.234 33.915,30.65 R9.2 35,34.2 36.55,35.75 42.25,35.75 42.635,35.365 P3.1 ; v1(35.5,10) 34,8.5 ; R12.2 45.75,7.75 v1(45.75,9.275)
  Bottom Layer w0.381: v1(63,6.025) 63.475,6.5 C18.2 66.25,6.5 68.75,9 76.444,9 77.1,8.344 77.1,7.204 ; J1.1 77.1,7.204 ; v1(81.546,7.204) 77.1,7.204
  Bottom Layer w0.5: C4.2 26.5,30.425 27.25,29.675 ; v1(26.65,21.25) 28,22.6 28,24.425 30.25,26.675 ; v1(56.35,13.25) 57.1,12.5 61.25,12.5 63,14.25 61.175,16.075 ; R1.2 58,23.25 58.65,23.9 R2.2 62.35,23.9 62.5,23.75 62.5,20.5 61.75,19.75 61.75,16.5 61.325,16.075 61.175,16.075 ; C3.1 61.175,16.075
  Bottom Layer w1.5: U3.2 22,29 22.675,29.675 27.25,29.675 30.25,26.675 32.925,24 ; v1(34.5,25.575) 32.925,24 ; v1(56.35,13.25) 56.15,13.25 52.175,9.275 v1(45.75,9.275) 42.525,9.275 40.75,7.5 38,7.5 v1(35.5,10) 34.7,10.8 34.7,22.225 32.925,24
FTDI_GREEN: D4.2 U6.23 | length 7.1
  Top Layer w0.381: U6.23 69.225,7.975 70.125,8.875 D4.2
FTDI_RED: D5.2 U6.22 | length 7.4
  Top Layer w0.381: U6.22 69.175,7.325 70.775,5.725 D5.2
FTDI_UART_RX: R22.2 U7.52 | length 27.9
  Top Layer w0.3: U7.52 42,24.213 42.424,23.789 43.989,23.789 45.7,25.5 46.75,25.5 47.5,24.75 47.5,22.4 49.5,20.4 49.5,9.75 51,8.25 R22.2
FTDI_UART_TX: R21.2 U7.51 | length 22.6
  Top Layer w0.3: U7.51 42.5,25.865 42.635,26 47.5,26 48,25.5 48,22.65 50,20.65 50,17.25 53.35,13.9 R21.2
ISO_N: P2.6 U1.14 | length 14.1
  Top Layer w0.381: U1.14 74.905,17.77 77.675,15 P2.6
ISO_P: P2.5 U1.16 | length 10
  Top Layer w0.381: U1.16 77.445,18.305 77.75,18 P2.5
JTAG_RST: C17.2 P3.10 R9.1 U7.63 | length 36
  Top Layer w0.3: R9.1 37.105,29.35 P3.10 ; v1(36.75,21) 36.75,21.25 36.5,21.5 U7.63 36.5,26.25 37.555,27.305 P3.10@37.555,29.05 ; v1(50.75,13.5) 50.75,11 51.75,10 C17.2
  Bottom Layer w0.3: v1(36.75,21) 36.75,17.75 41,13.5 v1(50.75,13.5)
JTAG_TCLK: P3.4 U7.62 | length 15.2
  Top Layer w0.3: U7.62 37,22.5 v1(38.5,21) ; v1(41.25,27.25) 41.365,27.365 P3.4
  Bottom Layer w0.3: v1(38.5,21) 38.5,25.5 40.25,27.25 v1(41.25,27.25)
JTAG_TDI: P3.8 U7.61 | length 4.6
  Top Layer w0.3: U7.61 37.5,26.25 38.825,27.575 P3.8@38.825,29.05
JTAG_TDO: P3.6 U7.58 | length 4.5
  Top Layer w0.3: U7.58 39,26.25 40.095,27.345 P3.6@40.095,29.05
JTAG_TMS: P3.2 R8.1 U7.64 | length 25.5
  Top Layer w0.3: U7.64 36,22.469 35.711,22.18 35.711,20.57 36.32,19.961 36.739,19.961 v1(37.95,18.75) ; P3.2 43.935,28.5 v1(44.75,28.5) 44.7,28.55 R8.1
  Bottom Layer w0.3: v1(37.95,18.75) 39.75,20.55 39.75,25.25 40.711,26.211 41.68,26.211 42.469,27 43.5,27 44.75,28.25 v1(44.75,28.5)
MSTR_EN: U2.1 U7.44 | length 26.4
  Top Layer w0.3: U7.44 46.75,21 47,21.25 47,23.425 v1(46.175,24.25) ; v1(47,27.25) 56.5,27.25 58,25.75 U2.1
  Bottom Layer w0.3: v1(46.175,24.25) 46,24.25 47,25.25 v1(47,27.25)
NetC1_2: C1.2 U1.15 | length 11.1
  Top Layer w0.3: U1.15 v1(76.175,22.5)
  Bottom Layer w0.3: C1.2 76,29.675 76.175,29.5 v1(76.175,22.5)
NetC2_2: C2.2 U1.2
NetC17_1: C17.1 U6.2 | length 3.8
  Top Layer w0.3: C17.1 56.125,10 56.7,10.575 U6.2
NetD1_1: D1.1 R5.2 T1.1 | length 10.9
  Bottom Layer w0.5: D1.1 16,22.475 17,23.475 T1.1 21.15,24.75 23,24.75 23.75,24 R5.2
NetD4_1: D4.1 R23.1 | length 2.2
  Top Layer w0.381: D4.1 R23.1
NetD5_1: D5.1 R24.1 | length 2.2
  Top Layer w0.381: D5.1 R24.1
NetD6_1: D6.1 R13.2 | length 3
  Top Layer w0.3: R13.2 D6.1
NetD7_1: D7.1 R14.2 | length 2.8
  Top Layer w0.3: R14.2 20.775,4.075 D7.1
NetD8_1: D8.1 R10.1 | length 3
  Top Layer w0.3: R10.1 34,3.7 D8.1
NetD8_2: D8.2 M2.3 | length 2
  Top Layer w0.3: D8.2 M2.3
NetD9_1: D9.1 R12.1 | length 3.1
  Top Layer w0.3: D9.1 44.15,4.85 R12.1
NetD9_2: D9.2 M1.3 | length 2.1
  Top Layer w0.3: D9.2 42,3.15 M1.3
NetM1_1: M1.1 R15.2 U7.33 | length 9.6
  Top Layer w0.3: M1.1 43.3,7.35 R15.2 43.3,10.3 45.5,12.5 U7.33
NetM2_1: M2.1 R11.2 U7.34 | length 14.1
  Top Layer w0.3: M2.1 38.3,7.35 R11.2 39.3,10 42,10 44.5,12.5 44.5,15.75 44.75,16 U7.34
NetPOWER1_1: POWER1.1 R4.1 | length 2.8
  Top Layer w0.3: R4.1 POWER1.1
NetR3_1: R3.1 U1.3 U2.10 | length 20.8
  Top Layer w0.3: U2.10 63.25,16.5 v1(64.5,15.25) ; v1(73.25,25.25) 74.905,26.905 U1.3
  Bottom Layer w0.3: v1(64.5,15.25) R3.1 65.2,16.7 71.25,22.75 72,22.75 72.5,23.25 72.5,24.5 v1(73.25,25.25)
NetR3_2: R3.2 U1.1 U2.11 | length 23.6
  Top Layer w0.3: U2.11 64,17 v1(66,19) ; v1(71.25,24) 76.25,24 77.445,25.195 U1.1
  Bottom Layer w0.3: R3.2 65,18 65.75,18.75 v1@66.25,18.75 ; v1(66,19) 71,24 v1(71.25,24)
NetR6_1: R6.1 U2.16 | length 2.2
  Top Layer w0.3: U2.16 62.85,19.9 R6.1
NetR6_2: R6.2 R7.2 U2.15 | length 5.9
  Top Layer w0.3: U2.15 63.608,19 64.15,19.542 R6.2 64.15,23.35 R7.2
NetR21_1: R21.1 U6.1 | length 3.9
  Top Layer w0.3: R21.1 56,11.75 56.525,11.225 U6.1
NetR22_1: R22.1 U6.5 | length 3.8
  Top Layer w0.3: R22.1 56,8.25 56.375,8.625 U6.5
SPIO.CS: CS.1 U2.5 U7.57 | length 36
  Top Layer w0.3: U7.57 39.5,23.25 41.5,21.25 v1(41.625,21.375) ; CS.1 49,22.75 50.75,21 50.75,17.5 51.5,16.75 53,16.75 v1(53.75,17.5) U2.5
  Bottom Layer w0.3: v1(41.625,21.375) 43.375,21.375 44,22 52.5,22 53.75,20.75 v1(53.75,17.5)
SPIO.MISO: MISO.1 R2.1 U2.3 U7.59 | length 37.2
  Top Layer w0.3: U7.59 38.5,23.469 40.258,21.71 40.258,20.792 41.55,19.5 41.553,19.503 v1(41.903,19.503) ; MISO.1 53.25,22.25 52.5,21.5 v1(52.5,19.75) 53.535,19.75 54.785,18.5 U2.3 59.961,18.5 60.75,19.289 v1(60.75,20.82)
  Bottom Layer w0.3: v1(41.903,19.503) 42.253,19.503 44.225,21.475 51.775,21.475 52.5,20.75 v1(52.5,19.75) ; R2.1 60.5,21.07 v1(60.75,20.82) v1@60.75,21.1
SPIO.MOSI: MOSI.1 R1.1 U2.2 U7.54 | length 28.7
  Top Layer w0.3: U7.54 41,24 42.25,22.75 v1(42.95,22.75) ; MOSI.1 55.25,22.31 54.5,21.56 54.5,20.5 v1(55.25,19.75) 56,19 U2.2
  Bottom Layer w0.3: v1(42.95,22.75) 43.2,22.5 53.25,22.5 54.75,21 54.75,20.25 v1(55.25,19.75) 56.5,21 57.9,21 R1.1
SPIO.SCK: SCK.1 U2.4 U7.60 | length 35.4
  Top Layer w0.3: U7.60 38,23.25 39.75,21.5 39.858,21.392 39.858,19.392 v1(40.5,18.75) ; SCK.1 51.25,18.75 v1(52,18) 52.781,18 53.32,18.539 54.18,18.539 54.719,18 U2.4
  Bottom Layer w0.3: v1(40.5,18.75) 41,18.25 42.75,18.25 45.5,21 51.25,21 51.25,18.75 v1(52,18)
SPLIT: C12.2 R16.2 R17.1 U4.5 | length 18.6
  Top Layer w0.381: R17.1 14.85,27.35 14.25,26.75 13.223,26.75 11.92,28.053 11.92,28.08 11,29 11,30.5 12.405,31.905 14.195,31.905 ; R16.2 14.195,31.905 ; U4.5 17.325,31.905 16.73,32.5 14.79,32.5 14.195,31.905
STBY: R18.2 U4.8 | length 2.4
  Top Layer w0.3: U4.8 20.275,26.75 21,26.025 R18.2
VCC_3V3: C19.2 U6.17 | length 4.9
  Top Layer w0.381: v1(62.925,4.075) U6.17
  Bottom Layer w0.381: v1@62.75,4.25 v1(62.925,4.075) 63.15,3.85 C19.2
pads on no net: J1.4 J1.6 J1.7 J1.8 J1.9 J1.10 J1.11 P1.9 P1.10 P2.9 P2.10 P3.7 P3.9 P3.MH1 P3.MH2 U1.4 U1.5 U1.6 U1.7 U1.8 U1.9 U1.10 U1.11 U1.12 U1.13 U3.THM U5.THM U6.3 U6.6 U6.8 U6.9 U6.10 U6.11 U6.12 U6.13 U6.14 U6.24 U6.27 U6.28 U7.1 U7.2 U7.3 U7.4 U7.11 U7.12 U7.13 U7.14 U7.15 U7.16 U7.17 U7.18 U7.19 U7.20 U7.21 U7.22 U7.23 U7.24 U7.25 U7.26 U7.28 U7.30 U7.31 U7.32 U7.35 U7.36 U7.38 U7.39 U7.42 U7.43 U7.46 U7.47 U7.48 U7.49 U7.50 U7.53 U7.55 U7.56

## Text inside footprints (layer, text, board x,y; h text height)
D4: Top Overlay "*" at 71.976,8.367 h1.52 r180
D5: Top Overlay "*" at 71.976,5.217 h1.52 r180
D6: Top Overlay "*" at 23.674,12.508 h1.52
D7: Top Overlay "*" at 23.524,4.508 h1.52
D8: Top Overlay "*" at 37.374,3.508 h1.52
D9: Top Overlay "*" at 41.476,2.492 h1.52 r180
POWER1: Top Overlay "*" at 23.524,8.508 h1.52